# EAGLE board check_battery (EAGLE 9.5.2)
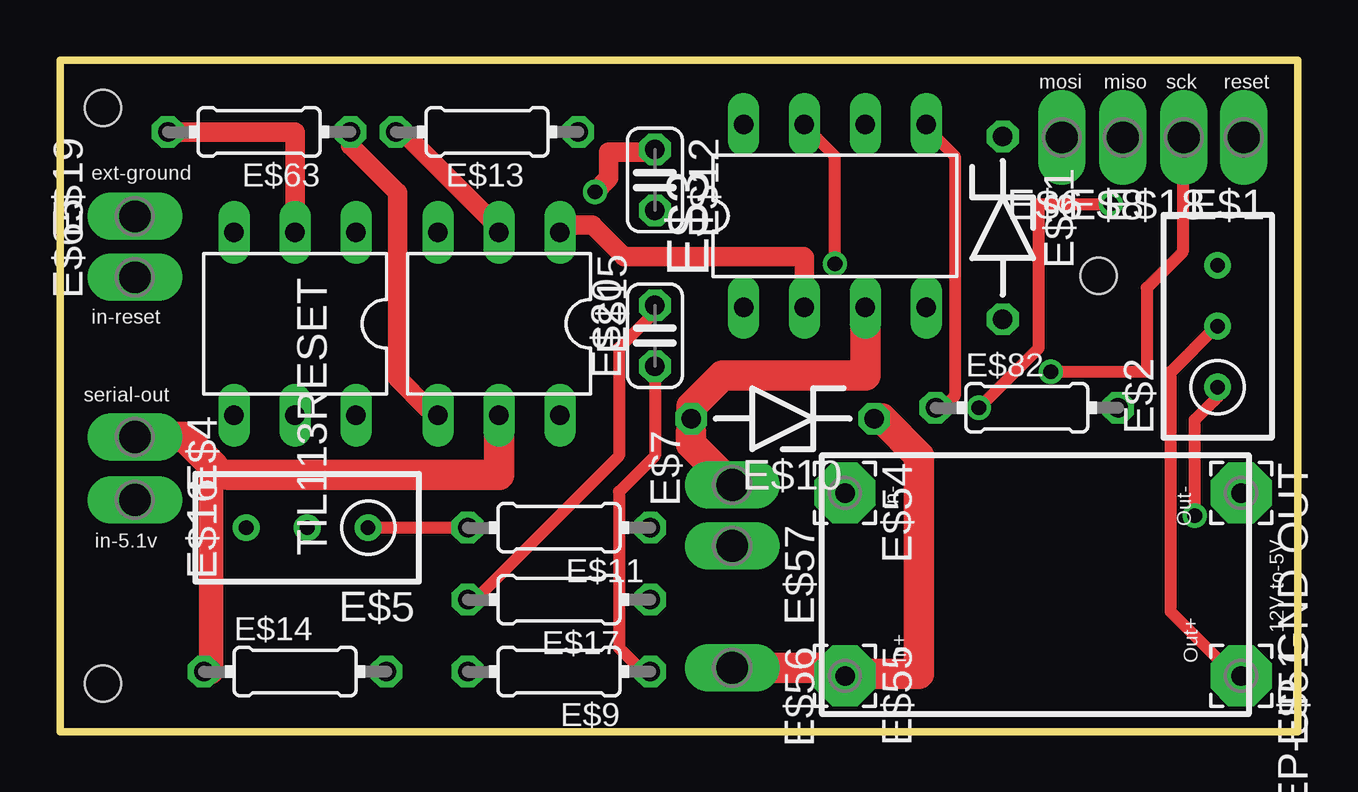
[diagram p0: board, top side]
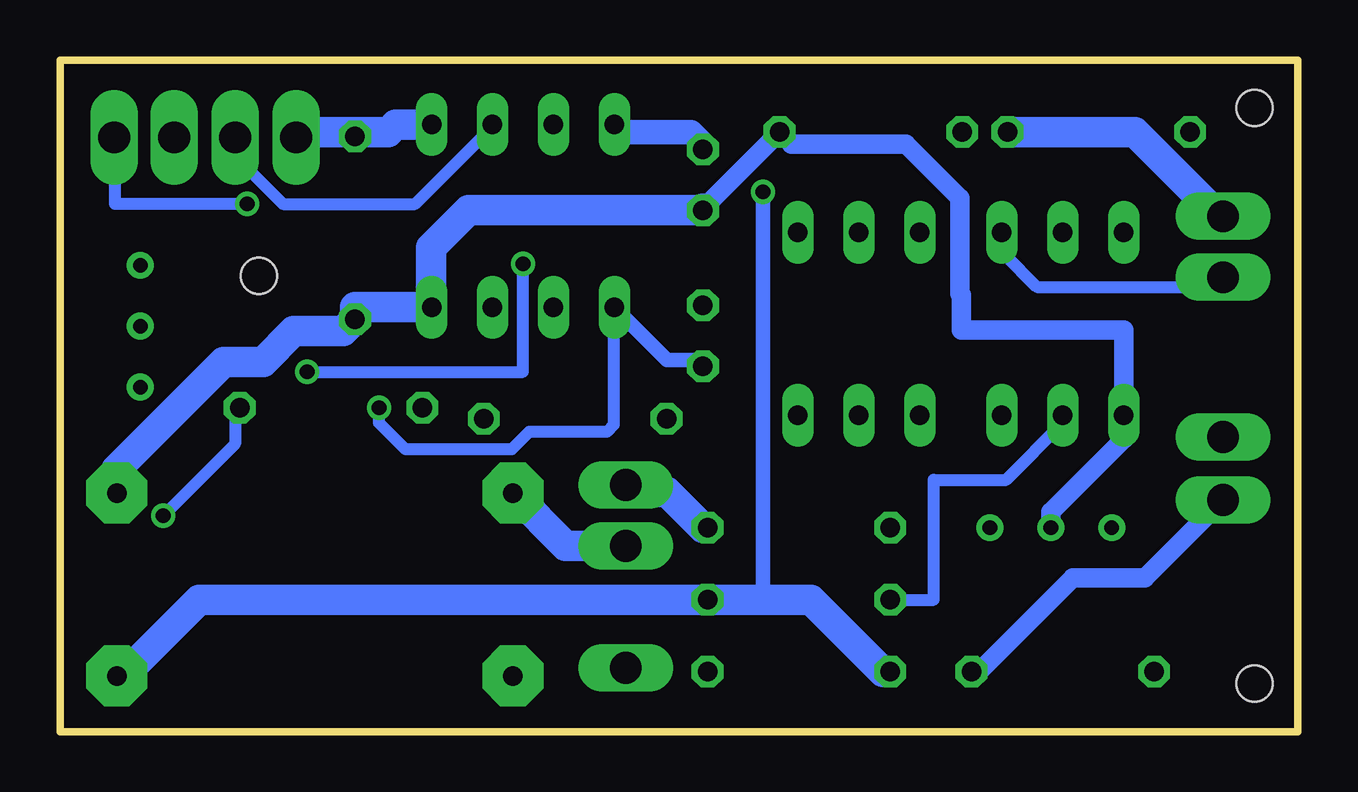
[diagram p1: board, bottom side, seen from below]

Size 51.6 x 28 mm. Coordinates in mm from the lower left corner, seen from the top.
Outline: 0,28 51.6,28 51.6,0 0,0 0,28
Copper layers (1*16): Top 0.035mm / dielectric 1.5mm / Bottom 0.035mm
Design rules "default *": minimum track width 20mil, minimum drill 24mil, track to track 8mil, track to pad 8mil, pad to pad 8mil, via to via 8mil, smd to smd 8mil, copper to edge 40mil, drill to drill 8mil, minimum pad ring 10mil, minimum via ring 8mil, stop-mask expansion 4mil, vias tented up to drill 0mil, thermal gap 10mil
Holes 1.5 mm at 43.3,19 1.8,26 1.8,2

## Footprints (pad centres in the part's own frame; a part is rotated, then mirrored left to right if it is on the bottom)
P1-13Y = drill 1.321 pad 1.905 long: TP 0,0
RTRIM3296W = drill 0.61: 1 0,-2.54; 2 0,0; 3 0,2.54
DIL8 = drill 0.813 long: 1 -3.81,-3.81; 2 -1.27,-3.81; 3 1.27,-3.81; 4 3.81,-3.81; 5 3.81,3.81; 6 1.27,3.81; 7 -1.27,3.81; 8 -3.81,3.81
0204/7 = drill 0.813 octagon: 1 -3.81,0; 2 3.81,0
ZDIO-7.5 = drill 0.813 octagon: A 3.81,0; C -3.81,0
C025-024X044 = drill 0.813 octagon: 1 -1.27,0; 2 1.27,0
DIL06 = drill 0.813 long: 1 -2.54,-3.81; 2 0,-3.81; 3 2.54,-3.81; 4 2.54,3.81; 5 0,3.81; 6 -2.54,3.81
2,54/0,8 = drill 0.813 pad 2.54 octagon: 1 0,0

## Placement (x,y rotation side)
E$1  [P1-13Y]  49.34,24.77 180 top
E$2  501  [RTRIM3296W]  48.25,16.9 0 top
E$3  Attiny85  [DIL8]  32.3,21.5 0 top
E$4  SERIAL OUT  [P1-13Y]  3.12,12.28 270 top
E$5  105  [RTRIM3296W]  10.3,8.5 90 top
E$6  [P1-13Y]  41.76,24.77 180 top
E$7  [P1-13Y]  28.02,10.28 90 top
E$8  [P1-13Y]  44.3,24.77 180 top
E$9  10K  [0204/7]  20.8,2.5 180 top
E$10  zener 10v  [ZDIO-7.5]  30.13,13.04 180 top
E$11  470  [0204/7]  20.8,8.5 180 top
E$12  1uF  [C025-024X044]  24.8,23 270 top
E$13  220  [0204/7]  17.8,25 180 top
E$14  10K  [0204/7]  9.8,2.5 0 top
E$15  TIL113-SERIAL  [DIL06]  18.3,17 180 top
E$16  [P1-13Y]  3.12,9.66 270 top
E$17  2.2k  [0204/7]  20.8,5.5 180 top
E$18  [P1-13Y]  46.84,24.77 180 top
E$19  in-ground  [P1-13Y]  3.12,21.48 90 top
E$20  0.1uF  [C025-024X044]  24.8,16.5 90 top
E$51  [2,54/0,8]  49.23,2.32 270 top
E$54  [2,54/0,8]  32.72,9.94 270 top
E$55  [2,54/0,8]  32.72,2.32 270 top
E$56  [P1-13Y]  28.02,2.66 270 top
E$57  [P1-13Y]  28.02,7.74 270 top
E$63  220  [0204/7]  8.3,25 180 top
E$65  [P1-13Y]  3.12,18.94 90 top
E$81  zener 3.9v  [ZDIO-7.5]  39.3,21 270 top
E$82  100  [0204/7]  40.3,13.5 0 top
STEP-UP-GND-OUT  [2,54/0,8]  49.23,9.94 270 top
TIL113RESET  TIL113 RESET  [DIL06]  9.8,17 180 top

## Library data of the parts
E$1 E$4 E$6-E$8 E$16 E$18 E$19 E$56 E$57 E$65 = testpad
E$2 E$5 E$12 E$20 = rcl
E$3 = microchip
E$9 E$11 E$13 E$14 E$17 E$63 E$82 = eagle-ltspice
E$10 E$81 = ref-packages-longpad
E$15 TIL113RESET = ic-package
E$51 E$54 E$55 STEP-UP-GND-OUT = wirepad

## Nets
EXT-5V: E$14.2 E$16.TP
EXT-GROUND: E$15.4 E$19.TP E$63.1
GND-BATTERY: E$3.4 E$5.2 E$12.2 E$13.1 E$81.A STEP-UP-GND-OUT.1 TIL113RESET.4
GROUND-BATTERY: E$54.1 E$57.TP
IN-12V-BATTERY: E$10.C E$55.1 E$56.TP
IN-TO-RESET-ATTINY85: E$65.TP TIL113RESET.1
OUT-5.15V: E$2.2 E$3.8 E$9.2 E$12.1 E$17.1 E$51.1
RESET: E$1.TP E$3.1 E$9.1 E$20.1
S$2: E$2.1 E$82.2
S$3: E$5.1 E$11.2
S$5: E$3.6 E$8.TP
S$7: E$3.7 E$18.TP
S$8: E$17.2 E$20.2 TIL113RESET.5
S$9: E$13.2 E$15.2
S$10: E$3.5 E$6.TP E$81.C E$82.1
S$15: E$63.2 TIL113RESET.2
SERIAL-OUT: E$4.TP E$14.1 E$15.5
TX-SERIAL-DATA: E$3.2 E$15.1
VZ-BATTERY-LEVEL: E$3.3 E$7.TP E$10.A E$11.1

## Tracks (layer width: path | path; a pad name or v marks a point on that pad's centre or on a via)
EXT-5V
  Bottom 0.508: 13.3,2.5 E$14.2
  Bottom 0.813: 13.3,2.5 9.39,6.41 6.39,6.41 3.3,9.5 E$16.TP
EXT-GROUND
  Top 0.508: 15.3,13.5 E$15.4
  Top 0.813: 15.3,13.5 14.07,14.73 14.07,22.47 12.11,24.42 E$63.1
  Bottom 0.508: 3.3,21.5 E$19.TP
  Bottom 1.27: 3.3,21.5 6.8,25 E$63.1
GND-BATTERY
  Bottom 0.61: E$13.1 21.11,24.5 | TIL113RESET.4 7.26,12.19
  Bottom 0.813: STEP-UP-GND-OUT.1 49.23,10.94 | E$3.4 36.13,17.71 | E$13.1 24.8,21.81 | TIL113RESET.4 7.26,16.75 14.03,16.75 14.03,18.2 14.09,18.26 14.09,22.25 16.34,24.5 21.11,24.5 | 7.26,12.19 10.3,9.15 E$5.2
  Bottom 1.27: 49.23,10.94 44.77,15.4 43.14,15.4 41.85,16.69 39.8,16.69 E$81.A 39.3,17.69 E$3.4 | 36.13,17.71 36.13,20.17 34.57,21.73 E$12.2 24.8,21.81
GROUND-BATTERY
  Bottom 1.27: E$57.TP 30.52,7.74 E$54.1
IN-12V-BATTERY
  Top 0.508: 32.8,3 32.58,2.66 | 32.8,3 E$55.1 | 32.8,3 32.8,2.4
  Top 0.813: E$10.C 34.26,13.04
  Top 1.27: 34.26,13.04 35.8,11.5 35.8,2.4 32.8,2.4 | E$56.TP 32.58,2.66
IN-TO-RESET-ATTINY85
  Bottom 0.508: E$65.TP 3.52,18.54 10.87,18.54 12.22,19.89 TIL113RESET.1
OUT-5.15V  (via drill 0.61)
  Top 0.508: E$2.2 48.2,16.9 46.3,15 46.3,5 48.8,2.5 E$51.1 | 24.8,24.16 E$12.1
  Top 0.813: 24.8,24.16 22.87,24.16 22.87,23.07 v22.3,22.5
  Bottom 0.508: 24.8,24.5 E$12.1 | 28.3,25 E$3.8 | 17.3,2.5 E$9.2 | 48.8,2.5 E$51.1
  Bottom 0.61: 22.3,5.5 v22.3,22.5
  Bottom 1.016: 24.8,24.5 25.3,25 28.3,25
  Bottom 1.27: 17.3,2.5 20.3,5.5 22.3,5.5 E$17.1 45.8,5.5 48.8,2.5
RESET  (via drill 0.61)
  Top 0.508: E$20.1 24.8,11.5 23.3,10 23.3,3.5 24.3,2.5 E$9.1 | v43.8,22 40.8,22 40.8,16 v38.3,13.5
  Bottom 0.508: E$3.1 28.48,17.68 28.52,17.68 28.52,12.78 28.8,12.5 32.04,12.5 32.78,11.76 37.19,11.76 38.3,12.88 v38.3,13.5 | 24.8,15.5 E$20.1 | v43.8,22 49.3,22 49.3,24.5 E$1.TP
  Bottom 0.61: 28.48,17.68 26.3,15.5 24.8,15.5
S$2  (via drill 0.61)
  Top 0.508: v47.3,9 47.3,13 48.3,14 E$2.1
  Bottom 0.508: v47.3,9 44.3,12 44.3,13.5 E$82.2
S$3
  Top 0.508: E$11.2 E$5.1
S$5
  Bottom 0.508: E$8.TP 44.3,24 42.3,22 36.8,22 33.8,25 E$3.6
S$7  (via drill 0.61)
  Top 0.508: v32.3,19.5 32.3,24 31.3,25 E$3.7 | v41.3,15 45.3,15 45.3,18.5 46.8,20 46.8,24.5 E$18.TP
  Bottom 0.508: v32.3,19.5 32.3,15 v41.3,15
S$8
  Top 0.508: E$17.2 17.3,5.5 23.3,11.5 23.3,16 24.8,17.5 E$20.2
  Bottom 0.508: E$17.2 15.18,5.5 15.18,10.5 12.16,10.5 9.8,12.86 TIL113RESET.5
S$9
  Top 0.508: 18.3,21 E$15.2 | 14.3,25 E$13.2
  Top 0.813: 14.3,25 18.3,21
S$10
  Top 0.508: E$82.1 36.8,13.5 37.3,14 37.3,24 36.3,25 E$3.5
  Bottom 0.508: 39.3,25 E$81.C
  Bottom 0.813: 37.92,25 37.61,25.31 | 41.53,24.77 41.3,25
  Bottom 1.27: 41.3,25 39.3,25 37.92,25 | E$6.TP 41.53,24.77 | 37.61,25.31 E$3.5
S$15
  Top 0.813: E$63.2 9.8,25 TIL113RESET.2
SERIAL-OUT
  Top 0.508: 6.3,2.5 E$14.1 | 6.3,11 6.38,11.08 6.52,11.22 | 6.77,10.97 6.8,11 7.04,10.69
  Top 0.813: 7.02,10.72 6.77,10.97 6.52,11.22
  Top 1.016: 6.3,11 6.3,2.5
  Top 1.27: E$4.TP 5.18,12.28 6.38,11.08 | 7.04,10.69 18.3,10.69 E$15.5
TX-SERIAL-DATA
  Top 0.813: E$3.2 31.03,19.76 30.99,19.79 23.51,19.79 22.19,21.11 21.14,21.11 E$15.1
VZ-BATTERY-LEVEL
  Top 0.508: 26.3,12.5 E$10.A
  Top 1.27: E$10.A 26.32,13.54 27.61,14.83 33.57,14.83 E$3.3 | E$7.TP 26.3,12 26.3,12.5
  Bottom 0.508: 24.8,8.5 E$11.1
  Bottom 1.27: 24.8,8.5 26.3,10 27.8,10 E$7.TP

## Text on the board
tPlace: mosi | miso | sck | reset | ext-ground | in-reset | serial-out | In- | Out- | in-5.1v | 12V-to-5V | In+ | Out+
bTest: check-battery-module v1.00